# Altium PCB OLED_0.96.PcbDoc
Units mil, origin at the board's own origin, x right, y up, seen from the top; angles counter-clockwise.
Board outline 1306 x 1306 mil, 2 copper layers (Top Layer, Bottom Layer); 28 components, 25 nets, 130 pads, 16 vias.
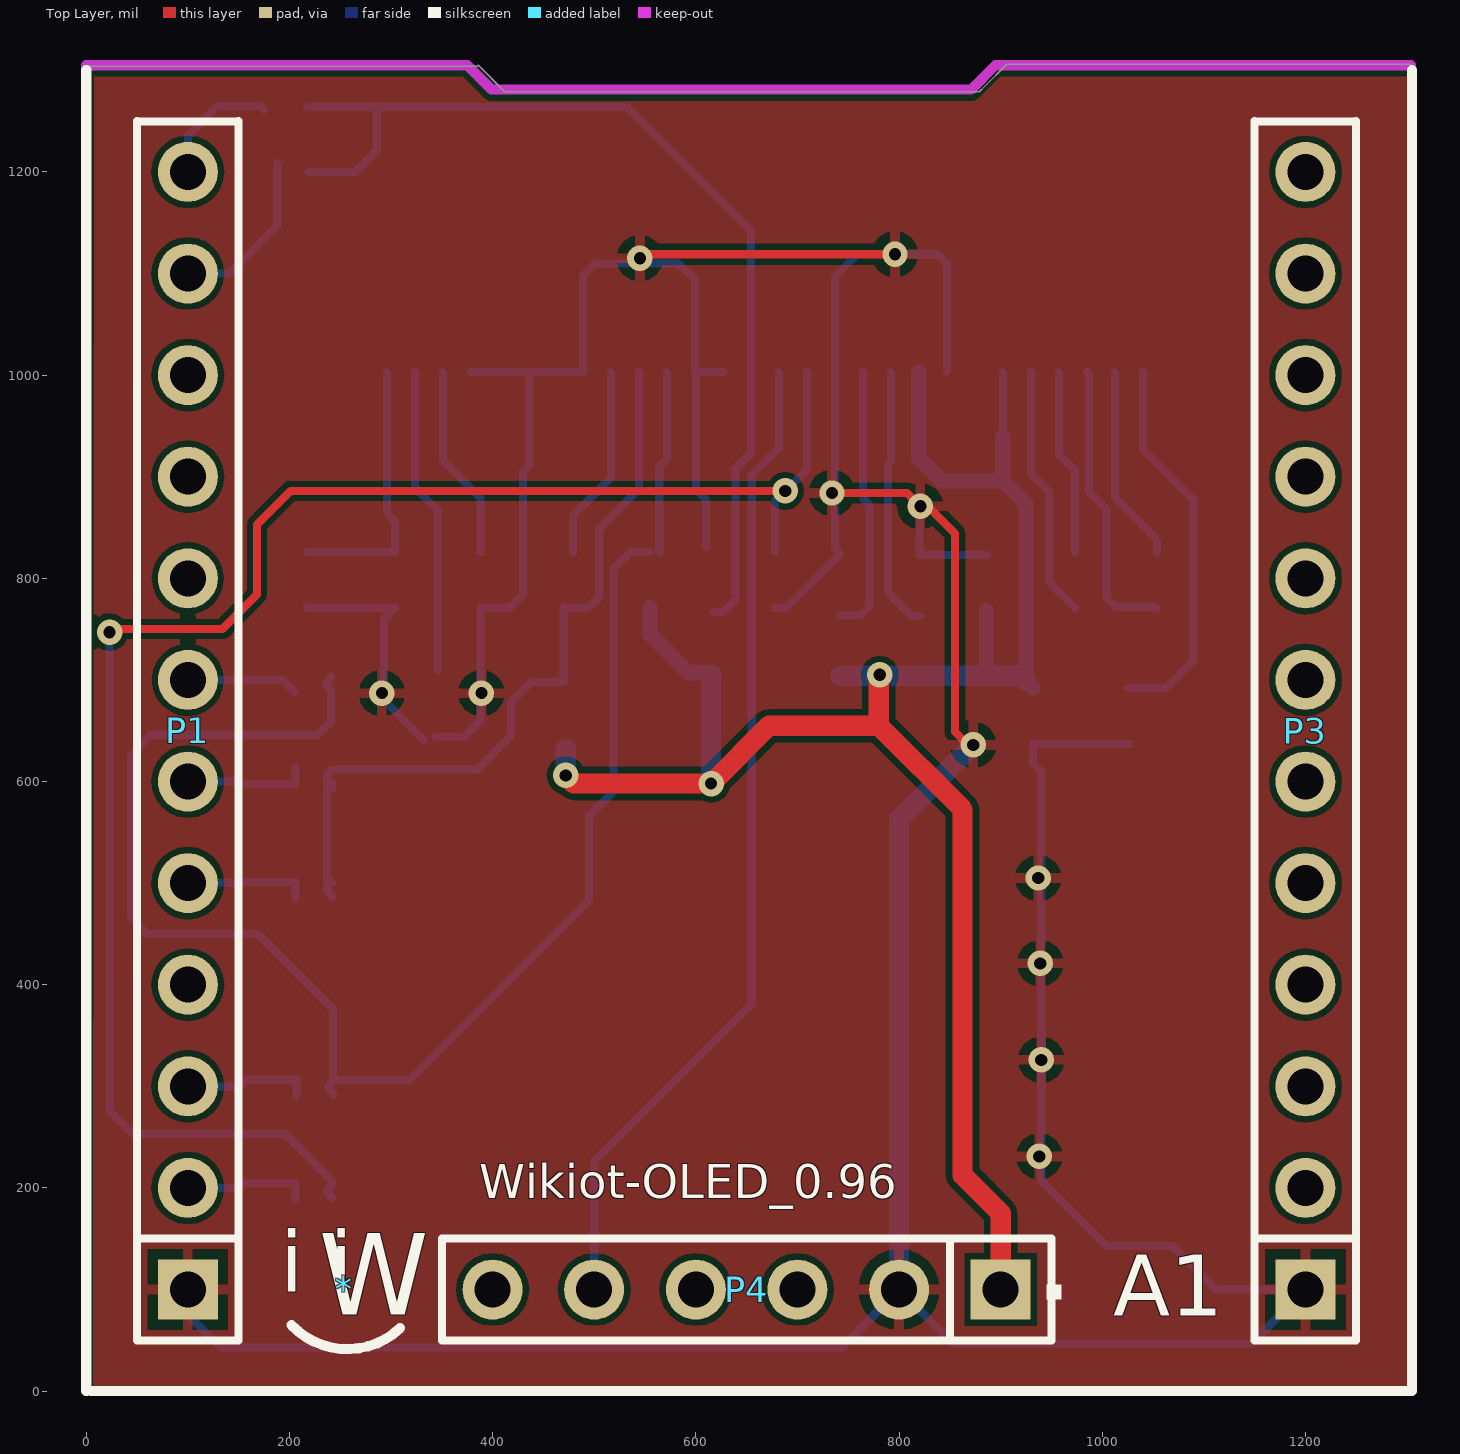
[diagram p0: Top Layer view]
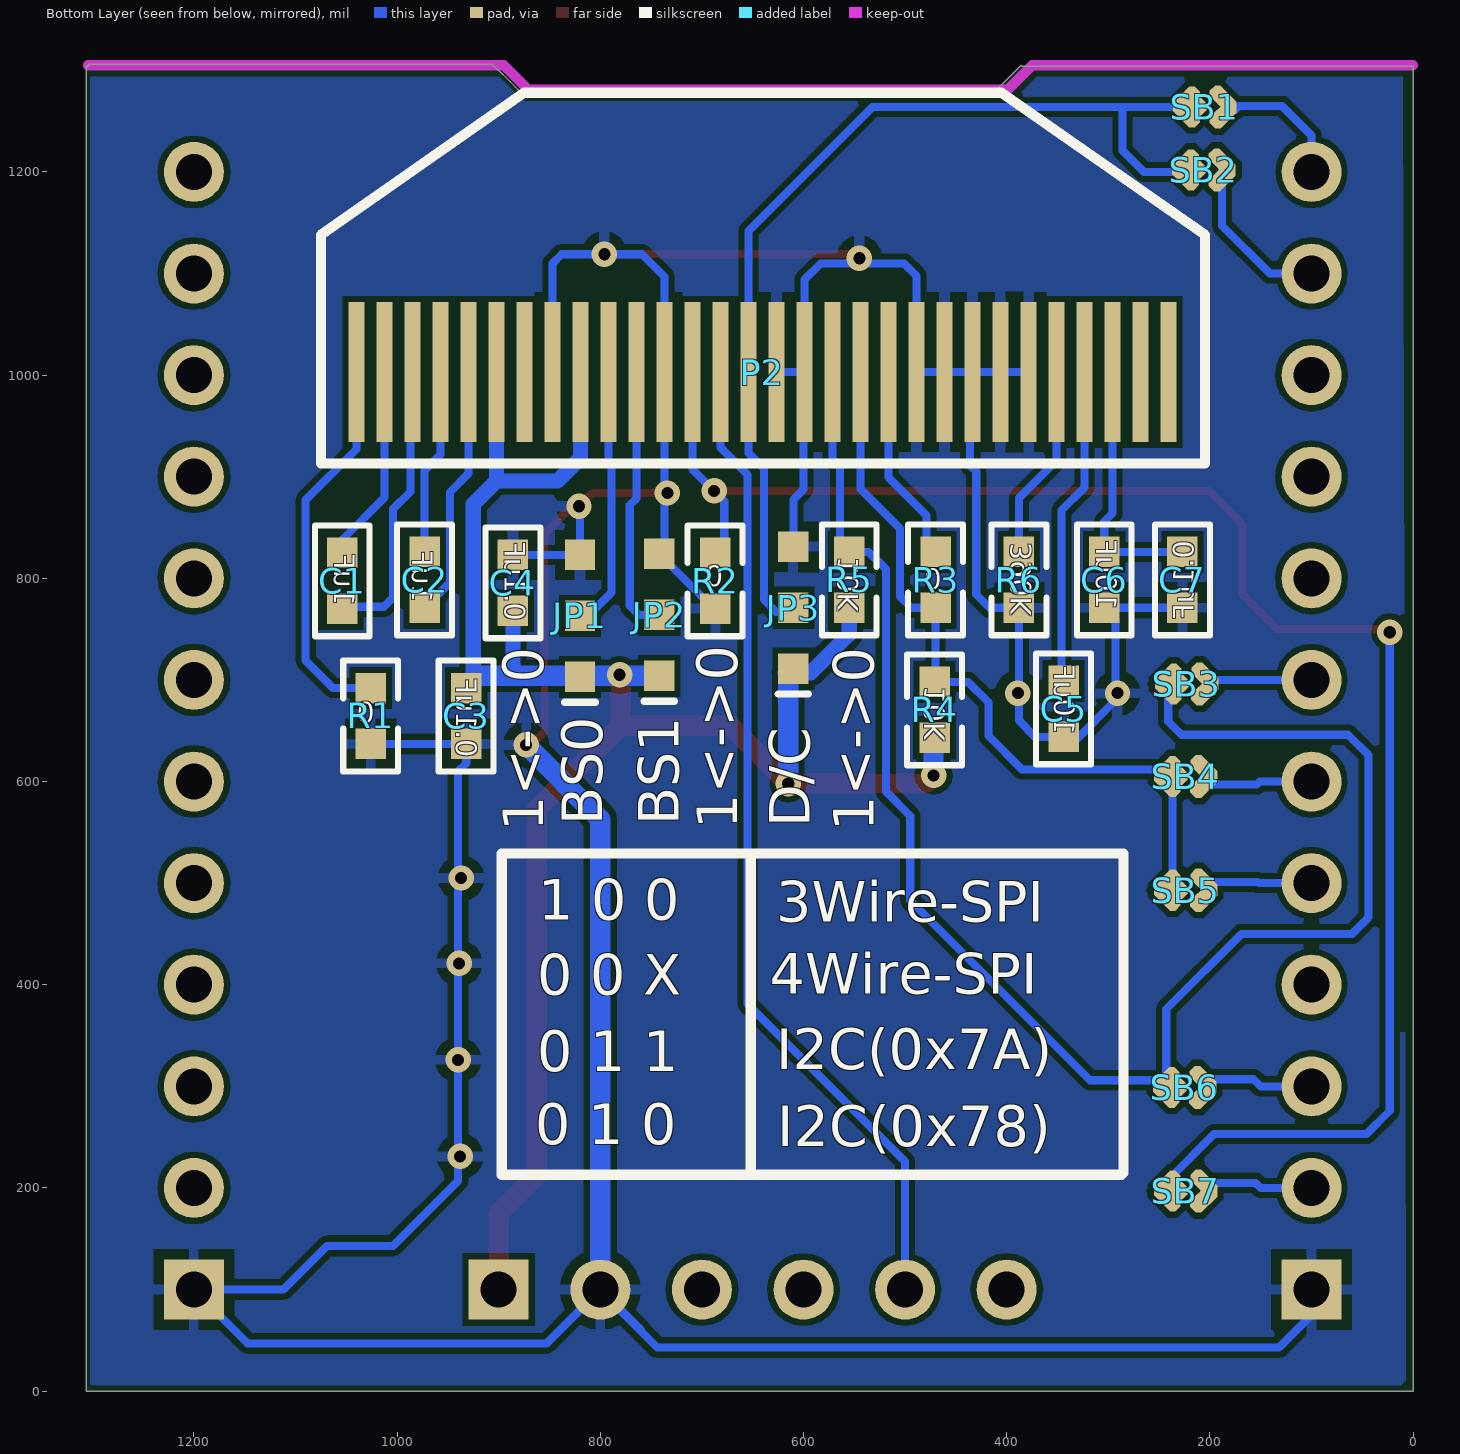
[diagram p1: Bottom Layer view, seen from below]

## Layer stack, top to bottom
Top Solder: solder mask 0.4, Solder Resist, Dk 3.5
Top Layer: signal copper 1.4
Dielectric 1: dielectric 12.6, FR-4, Dk 4.8
Bottom Layer: signal copper 1.4
Bottom Solder: solder mask 0.4, Solder Resist, Dk 3.5

## Board outline
0,1304 385,1304 386,1305 412,1279 457,1279 879,1279 884,1284 906,1306 910,1306 1303,1306 1304,1305 1306,1303 1306,0 0,0

## Design rules (kind name [scope] priority, off if disabled: settings)
Clearance [All] p1: gap=6
PolygonConnect [All] p1: connectstyle=Relief reliefconductorwidth=10 reliefentries=4 polygonreliefangle="90 Angle" airgapwidth=10
RoomDefinition OLED_0.96 [InComponentClass('OLED_0.96')] p1: confinementstyle=ConfineIn formatcopy=TRUE lockcomponents=FALSE outline 1309,-4 0,-4 0,1304 1309,1304
RoutingVias [All] p1: holewidth=12 width=25 viastyle="Through Hole" minholewidth=10 minwidth=20 maxholewidth=28 maxwidth=50
SolderMaskExpansion [All] p1: expansion=4
Width [All] p1: maxlimit=20 minlimit=7 preferedwidth=8
30 further rules are at their usual default settings.

## Components (designator, comment, footprint, x,y, rotation, side; value= is the part's Value field where it differs from the comment)
* "LOGO" Logo 254,101 r0 top
C1 "1uF" 0603C 1054,825 r270 bottom
C2 "1uF" 0603C 973,826 r270 bottom
C3 "0.1uF" 0603C 932,692 r270 bottom
C4 "0.1uF" 0603C 886,823 r270 bottom
C5 "10uF" 0603C 344,699 r270 bottom
C6 "10uF" 0603C 304,826 r270 bottom
C7 "0.1uF" 0603C 227,826 r270 bottom
JP1 "JP3" JUMPER3_SMD 820,733 r90 bottom
JP2 "JP3" JUMPER3_SMD 742,734 r90 bottom
JP3 "JP3" JUMPER3_SMD 610,741 r90 bottom
P1 "Synio Header-L 12-Pin" HDR1X12/2.54MM 100,100 r90 top
P2 "OLED_0.96_SSD1306" OLED_0.96_SSD1306 1040,1003 r180 bottom
P3 "Synio Header-R 12-Pin" HDR1X12/2.54MM 1200,100 r90 top
P4 "Synio Power Header 6 Pin" HDR1X6/2.54MM 900,100 r180 top
R1 "0" 0603R 1026,692 r270 bottom
R2 "0" 0603R 687,825 r270 bottom
R3 "0" 0603R 470,826 r270 bottom
R4 "10K" 0603R 471,643 r90 bottom
R5 "10K" 0603R 555,771 r90 bottom
R6 "390K" 0603R 388,771 r90 bottom
SB1 "Circuit Breaker" JP2_SMD 205,1264 r0 bottom
SB2 "Circuit Breaker" JP2_SMD 206,1202 r0 bottom
SB3 "Circuit Breaker" JP2_SMD 223,696 r0 bottom
SB4 "Circuit Breaker" JP2_SMD 224,605 r0 bottom
SB5 "Circuit Breaker" JP2_SMD 224,493 r0 bottom
SB6 "Circuit Breaker" JP2_SMD 225,299 r0 bottom
SB7 "Circuit Breaker" JP2_SMD 224,197 r0 bottom

## Footprints (in the part's own frame and the unit in brackets; to place one, negate y for a bottom-side part, rotate by r counter-clockwise, add the part's x,y. Pads: shape width x height; smd on the part's side, far side on the other; paste and mask are expansions set on the pad)
0603C [mil]
  rect 30x30 smd: 1(0,0) 2(55,0)
  silkscreen extent -27,-27 82,27, body extent -4,-16 58,16, height 12
0603R [mil]
  rect 30x30 smd: 1(0,0) 2(55,0)
  silkscreen extent -27,-27 82,27, body extent -4,-18 58,16, height 18
HDR1X6/2.54MM [mm] "Connector; Header; 6 Position"
  rect 1.5x1.5 hole 0.9: 1(0,0)
  round 1.5 hole 0.9: 2(2.54,0) 3(5.08,0) 4(7.62,0) 5(10.16,0) 6(12.7,0)
  silkscreen extent -1.52,-1.27 13.97,1.27, body extent -1.32,-1.5 13.92,1.42, height 8.51
HDR1X12/2.54MM [mm] "Connector; Header; 12 Position"
  rect 1.5x1.5 hole 0.9: 1(0,0)
  round 1.5 hole 0.9: 2(2.54,0) 3(5.08,0) 4(7.62,0) 5(10.16,0) 6(12.7,0) 7(15.24,0) 8(17.78,0) 9(20.32,0) 10(22.86,0) 11(25.4,0) 12(27.94,0)
  silkscreen extent -1.27,-1.27 29.21,1.27, body extent -1.29,-1.48 29.19,1.44, height 8.51
JP2_SMD [mil]
  oct 15x30 smd rot 45: 1(-18,-8) 2(18,7)
  oct 15.75x30 smd rot 135: 1(-18,8)
  rect 26x26 smd rot 45: 2(13,0)
  oct 15x30 smd rot 135: 2(18,-7)
JUMPER3_SMD [mil]
  rect 30x30 smd: 1(-30,0) 2(30,0) 3(90,0)
  silkscreen extent -55,-15 -55,15
Logo [mil]
  silkscreen extent -52,-60 55,-36
OLED_0.96_SSD1306 [mm]
  rect 0.4x3.5 smd: 1(0,0) 2(0.7,0) 3(1.4,0) 4(2.1,0) 5(2.8,0) 6(3.5,0) 7(4.2,0) 8(4.9,0) 9(5.6,0) 10(6.3,0) 11(7,0) 12(7.7,0) 13(8.4,0) 14(9.1,0) 15(9.8,0) 16(10.5,0) 17(11.2,0) 18(11.9,0) 19(12.6,0) 20(13.3,0) 21(14,0) 22(14.7,0) 23(15.4,0) 24(16.1,0) 25(16.8,0) 26(17.5,0) 27(18.2,0) 28(18.9,0) 29(19.6,0) 30(20.3,0)
  silkscreen extent -0.89,-2.29 21.21,6.99

## Part data
C1 C2 C3 C4 C5 C6 C7: library part Cap, "Capacitor"
P1: "Synio Header-L, 12-Pin"
P3: "Synio Header-R, 12-Pin"
R1 R2 R3 R4 R5 R6: library part Res, "Resistor"

## Via types
v1: diameter 25, hole 12, Top Layer to Bottom Layer, 16 vias

## Nets (pads, with @x,y where several pads share a name; then routed paths per layer and width w, separated by ;. In a path a pad name is that pad's centre, name@x,y a point inside that pad or via, vN(x,y) a via of type N, cw(c..) or ccw(c..) an arc to the next point about the centre after c; other vN are vias at no path point)
D3V3: C3.1 C4.2 JP1.1 JP2.1 JP3.1 P2.6 P2.9 P4.1 R4.1 R5.1 | length 1976.2
  Top Layer w20: v1(472,606) 480,598 v1(615,598) 672,655 780,655 ; v1(781,705) 780,704 780,655 ; P4.1 900,175 862.5,212.5 862.5,572.5 780,655
  Bottom Layer w8: P2.6@902.2,939 P2.6
  Bottom Layer w15: R5.1 555,745 593,707 JP3.1@618,707 ; P2.9 819.53,918.47 842.2,895.8 902.2,895.8 ; C4.2 886,705 887,704 ; P2.6@902.2,939 902.2,895.8 ; C3.1 925,699 925,873 902.2,895.8
  Bottom Layer w20: v1(472,606) R4.1@472,632 ; v1(615,598) JP3.1@615,704 ; JP2.1 887,704 920,704 C3.1@925,699
GND: C3.2 C4.1 C5.2 C6.2 C7.2 JP1.3 JP2.3 JP3.3 P1.1 P2.8 P2.12 P2.16 P2.17 P2.21 P2.22 P2.23 P2.24 P2.25 P3.1 P4.2 R1.2 R2.2 R6.1 | length 5279.5
  Top Layer w8: v1(545,1115) 545,1119 v1(796,1119) ; v1(734,884) 808,884 v1(821,871) 828,871 855,844 855,649 868,636 v1(873,636)
  Bottom Layer w8: P1.1 100,75 132,43 744,43 800,99 P4.2 ; C7.2@217,771 C6.2 293,760 293,680 C5.2@332,641 ; C5.2 372,644 388,660 R6.1 417,771 430,784 430,905 436,911 436,1000.7 P2.23 ; P2.25 P2.24 P2.23 ; v1(545,1115) v1@540,1110 ; JP3.3 610,877.39 600,887.39 600,1002.06 P2.17 ; P2.16 P2.17 ; R2.2@678,771 689,771 JP2.3 736.85,829.15 v1@736.85,881.15 ; v1(734,884) v1@736.85,881.15 ; 760,60 P4.2 ; v1(821,871) 820,870 JP1.3 C4.1 ; P2.8 847.09,1109.91 838,1119 v1(796,1119) 759,1119 736.85,1096.85 P2.12 v1@736.85,881.15 ; R1.2 C3.2 932,618 940,610 940,207 1004,143 1069,143 1112,100 P3.1 1147,47 853,47 P4.2 ; P2.23 P2.22 P2.21 488.82,1097.82 501,1110 v1@540,1110 ; v1@540,1110 583,1110 599.06,1093.94 P2.17
  Bottom Layer w20: P4.2 800,563 v1(873,636)
  other v1: 938,231 940,326 939,421 937,505 291,687 389,687
NetC1_1: C1.1 P2.2 | length 195.2
  Bottom Layer w8: P2.2 1012.44,879.56 1054,838 C1.1
NetC1_2: C1.2 P2.3 | length 284.5
  Bottom Layer w8: P2.3 987,1000.88 987,885.2 1004,868.2 1004,781 1013,772 1052,772 C1.2
NetC2_1: C2.1 P2.4 | length 183.5
  Bottom Layer w8: P2.4 957.32,921.68 973,906 C2.1
NetC2_2: C2.2 P2.5 | length 249.9
  Bottom Layer w8: P2.5 929.76,903 948,884.76 948,796 C2.2
NetC5_1: C5.1 P2.27 | length 302.3
  Bottom Layer w8: P2.27 323.46,889.54 346,867 C5.1@346,710
NetC6_1: C6.1 C7.1 P2.28 | length 267.4
  Bottom Layer w8: C7.1@217,826 C6.1 304,856 295.91,864.09 P2.28
NetJP1_2: JP1.2 P2.10 | length 258.8
  Bottom Layer w8: P2.10 791.97,915.03 789,912.06 789,786 812,763 JP1.2
NetJP2_2: JP2.2 P2.11 | length 265.5
  Bottom Layer w8: JP2.2 762,764 771,773 771,872 764.41,878.59 P2.11
NetP1_2: P1.2 SB7.1 | length 124.1
  Bottom Layer w8: P1.2 150,200 155,205 206,205 SB7.1@206,189
NetP1_3: P1.3 SB6.1 | length 125.9
  Bottom Layer w8: P1.3 150,300 157,307 207,307 SB6.1@207,291
NetP1_5: P1.5 SB5.1 | length 122.4
  Bottom Layer w8: P1.5 152,500 153,501 206,501 SB5.1@206,485
NetP1_6: P1.6 SB4.1 | length 123.2
  Bottom Layer w8: P1.6 151,600 154,597 206,597 SB4.1@206,613
NetP1_7: P1.7 SB3.1 | length 110
  Bottom Layer w8: P1.7 193,700 SB3.1@205,688
NetP1_11: P1.11 SB2.1 | length 168.5
  Bottom Layer w8: P1.11 141,1100 188,1147 188,1192 SB2.1@188,1208
NetP1_12: P1.12 SB1.1 | length 124.6
  Bottom Layer w8: P1.12 100,1236 129,1265 171.2,1265 SB1.1@175,1261.2
NetP2_1: P2.1 R1.1 | length 379.9
  Bottom Layer w8: R1.1 1063,692 1090,719 1090,877 1040,927 P2.1
NetP2_20: P2.20 R3.1 | length 192.5
  Bottom Layer w8: R3.1@479,826 479,862 516.38,899.38 P2.20
NetP2_26: P2.26 R6.2 | length 192.3
  Bottom Layer w8: P2.26 351.02,915.98 388,879 R6.2
OLED_CS: P2.13 R2.1 SB7.2 | length 1691.7
  Top Layer w8: v1(23,747) 26,750 134,750 168,784 168,853 201,886 v1(688,886)
  Bottom Layer w8: v1(23,747) 23,276 46,253 196,253 242,207 242,204 237,197 SB7.2@242,190 ; R2.1@678,826 678,876 v1(688,886) 709.29,907.29 P2.13
OLED_D/C: JP3.2 P2.15 SB1.2 SB2.2 | length 1000.7
  Bottom Layer w8: SB1.2@218,1264 286,1264 ; SB2.2@219,1200 265,1200 286,1221 286,1264 ; JP3.2@618,767 627,767 639,779 639,908 654.17,923.17 P2.15 654.17,1142 532.17,1264 286,1264
OLED_NRST: P2.14 P4.5 | length 978.3
  Bottom Layer w8: P4.5 500,226 655,381 655,902 681.73,928.73 P2.14
OLED_SCL/CLK: P2.18 R5.2 SB3.2 SB6.2 | length 1625.8
  Bottom Layer w8: SB3.2@241,703 236,696 241,689 241,659 228,646 64,646 44,626 44,466 60,450 169,450 243,376 SB6.2@243,306 ; SB6.2@243,292 238,299 SB6.2@243,306 ; R5.2 536,826 519,809 519,590 495,566 495,483 318,306 SB6.2@243,306 ; R5.2@564,826 564,910 571.5,917.5 P2.18
OLED_SDA/DIN: P2.19 R3.2 R4.2 SB4.2 SB5.2 | length 778.9
  Bottom Layer w8: SB5.2@242,486 237,493 237,500 242,500 237,505 237,593 242,593 242,598 237,598 237,605 242,612 385,612 418,645 418,678 438,698 470,698 R3.2 494,771 505,782 505,849 543.94,887.94 P2.19
pads on no net: P1.4 P1.8 P1.9 P1.10 P2.7 P2.29 P2.30 P3.2 P3.3 P3.4 P3.5 P3.6 P3.7 P3.8 P3.9 P3.10 P3.11 P3.12 P4.3 P4.4 P4.6

## Polygon pours and split planes (outlines as drawn)
GND on Bottom Layer "Bottom Layer-No Net" (solid, pour order 2): 10,1298 374,1298 374,1293 388,1279 389,1278 882,1278 882,1279 901,1298 903,1296 1302,1296 1302,4 1304,2 1300,6 426,6 8,6 7,7
GND on Top Layer "Bottom Layer-No Net" (solid, pour order 4): 8,1295 372,1295 375,1292 386,1281 399,1281 880,1281 882,1279 898,1295 898,1298 1298,1298 1301,1295 1304,1292 1304,2 10,2 7,5

## Keep-outs
Keep-Out Layer:
  lines w10: 0,1305 375,1305 399,1281 871,1281 895,1305 1304,1305

## Silkscreen, mask and mechanical layers (free items; w line width, h text height)
Top Overlay:
  lines w10: 0,0 0,1300 ; 5,0 1305,0 1305,1300
  text "Wikiot-OLED_0.96" at 387,190 h33.46
  text "A1" at 1011,74 h60
Bottom Overlay:
  lines w10: 285,215 285,529 302,529 897,529 897,216 ; 287,213 301,213 897,213 ; 652,216 652,528
  text "BS1" at 723,557 h40 r270
  text "BS0" at 798,557 h40 r270
  text "D/C" at 594,555 h40 r270
  text "1<->0" at 665,553 h40 r270
  text "1<->0" at 531,551 h40 r270
  text "1<->0" at 856,551 h40 r270
  text "1 0 0" at 861,464 h40
  text "3Wire-SPI" at 627,462 h40
  text "4Wire-SPI" at 633,391 h40
  text "0 0 X" at 862,390 h40
  text "I2C(0x7A)" at 627,317 h40
  text "0 1 1" at 862,315 h40
  text "0 1 0" at 864,243 h40
  text "I2C(0x78)" at 626,241 h40

## Text inside footprints (layer, text, board x,y; h text height)
*: Top Overlay "i i" at 191,98 h60; Top Overlay "W" at 229,75 h80